# Altium PCB Passenger Side PCB.PcbDoc
Units mm, origin at the board's own origin, x right, y up, seen from the top; angles counter-clockwise.
Board outline 99.7 x 17.4 mm, 4 copper layers (Top Layer, Ground, Power, Bottom Layer), stack 0.757 mm thick; 27 components, 19 nets, 73 pads, 66 vias.
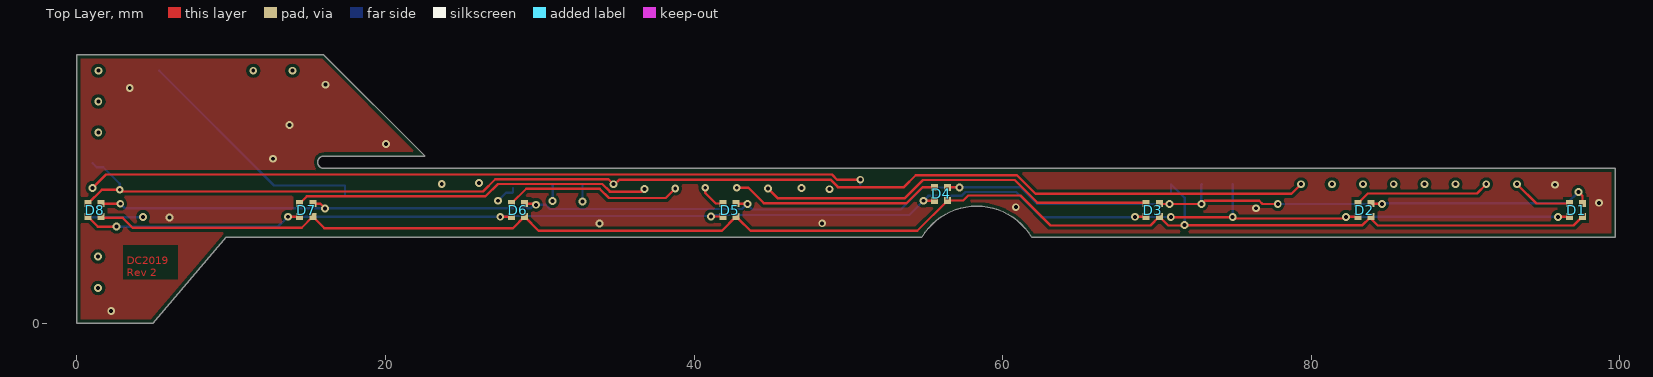
[diagram p0: Top Layer view]
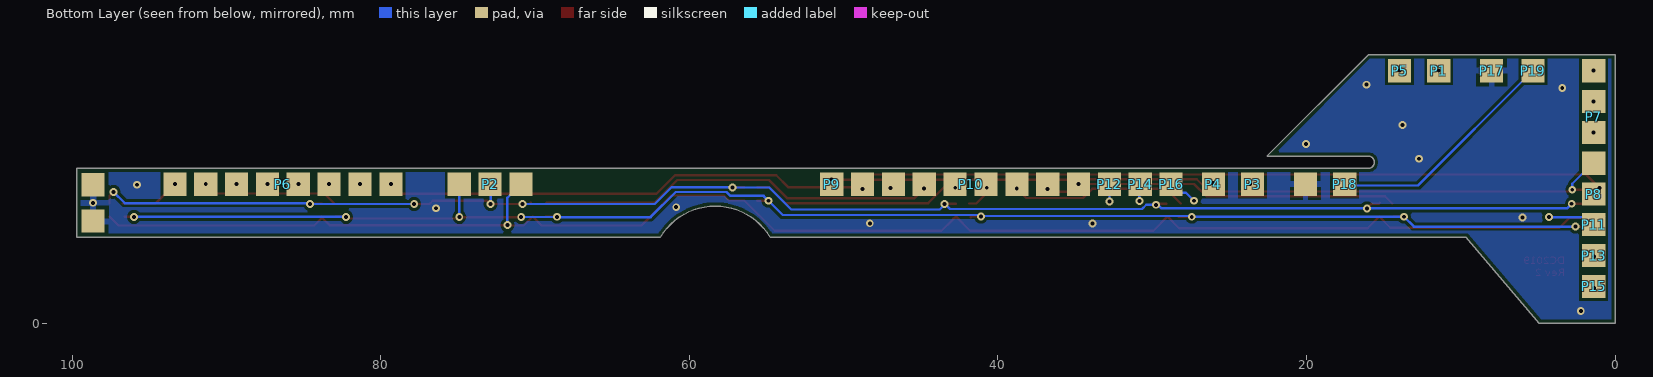
[diagram p1: Bottom Layer view, seen from below]
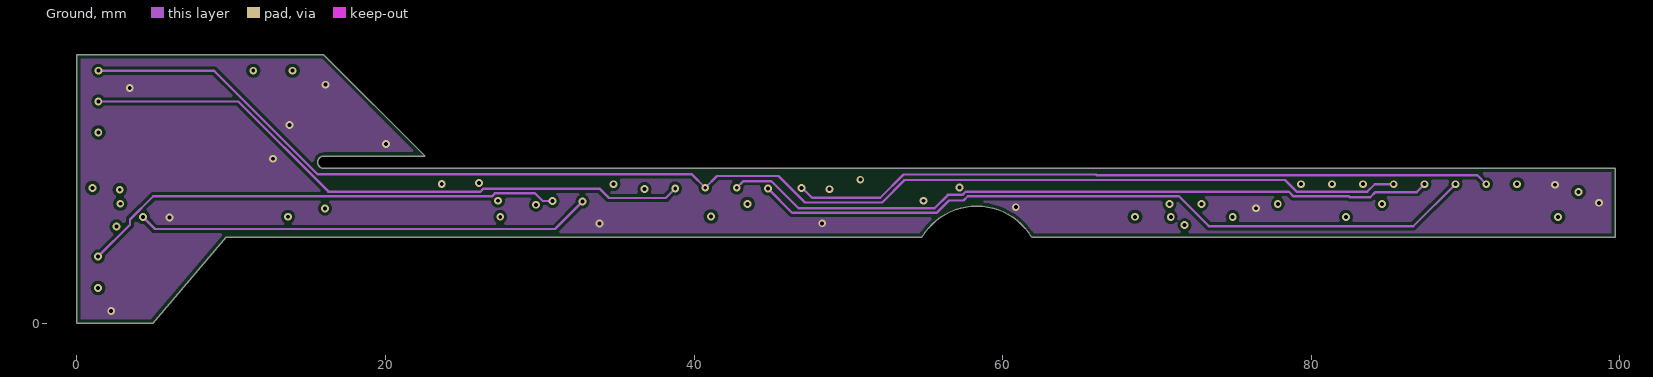
[diagram p2: Ground]
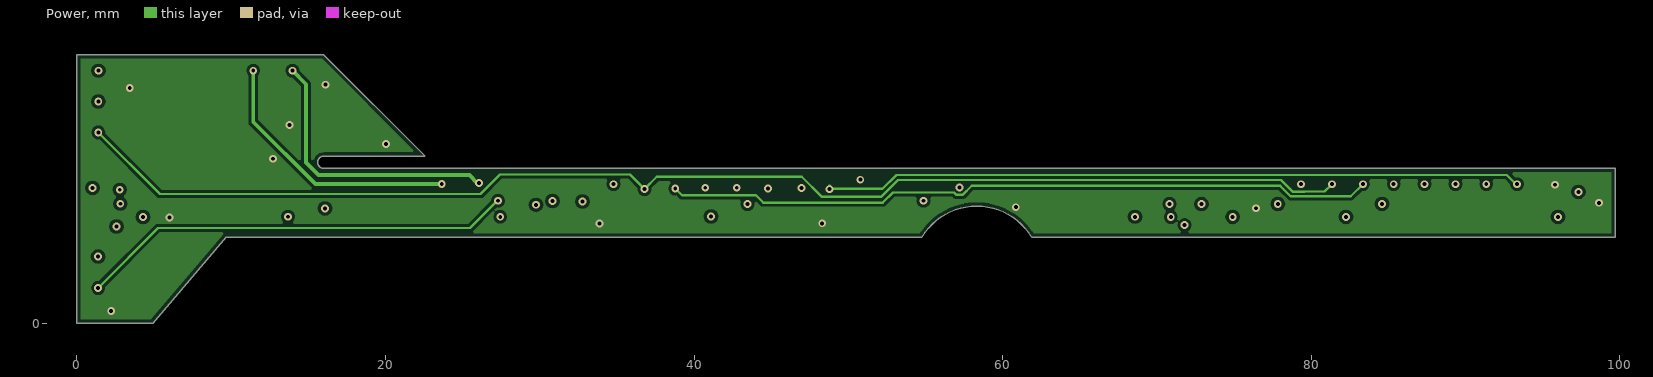
[diagram p3: Power]
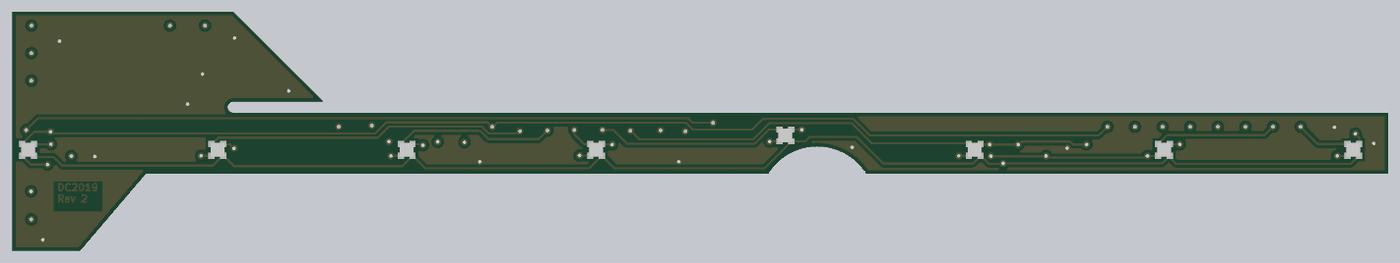
[diagram p4: 3D render of the assembled board from above, using the file's embedded part models]

## Layer stack, top to bottom
Top Solder: solder mask 0.0102, Solder Resist, Dk 3.5
Top Layer: signal copper 0.0356
Dielectric 2: prepreg 0.1422, PP-006, Dk 4.1
Ground: signal copper 0.0356
Dielectric 1: dielectric 0.3302, FR-4, Dk 4.8
Power: signal copper 0.0356
Dielectric 3: prepreg 0.1422, PP-006, Dk 4.1
Bottom Layer: signal copper 0.0356
Bottom Solder: solder mask 0.0102, Solder Resist, Dk 3.5

## Board outline
0,0 0,17.403 16.001,17.403 22.552,10.846 16.001,10.846 ccw(c16.001,10.446) 16.001,10.046 99.695,10.046 99.695,5.601 61.875,5.601 ccw(c58.322,3.433) 54.769,5.601 9.671,5.601 4.907,0

## Design rules (kind name [scope] priority, off if disabled: settings)
BoardOutlineClearance [All] p1: gap=0.254 ignorepadtopadclearanceinfootprint=FALSE
Clearance [All] p1: gap=0.152 ignorepadtopadclearanceinfootprint=FALSE except(0: Arc-Hole Track-Hole SMDPad-Hole THPad-Hole Via-Hole Fill-Hole Poly-Hole Region-Hole Text-Hole; 0.203: Arc-Poly Track-Poly SMDPad-Poly THPad-Poly Via-Poly Fill-Poly Poly-Poly Poly-Text)
DiffPairsRouting [All] p1: maxlimit=0.254 minlimit=0.152 mostfreqgap=0.152 toplayer_minwidth=0.152 toplayer_maxwidth=0.381 toplayer_prefwidth=0.203 midlayer1_minwidth=0.152 midlayer1_maxwidth=0.381 midlayer1_prefwidth=0.203 midlayer2_minwidth=0.152 midlayer2_maxwidth=0.381 midlayer2_prefwidth=0.203 bottomlayer_minwidth=0.152 bottomlayer_maxwidth=0.381 bottomlayer_prefwidth=0.203 maxuncoupledlength=12.7
HoleSize [All] p1: absolutevalues=TRUE maxlimit=3.81 minlimit=0.254 maxpercent=80.000 minpercent=20.000
HoleToHoleClearance [All] p1: gap=0.457 allowstackedmicrovias=TRUE
MinimumAnnularRing [All] p1: minimumring=0.127
MinimumSolderMaskSliver [All] p1: minsoldermaskwidth=0.152
PlaneClearance [All] p1: clearance=0.305
PlaneConnect PlaneConnect_IsVia [IsVia] p1: planeconnectstyle=Direct reliefexpansion=0.508 reliefentries=4 reliefconductorwidth=0.254 reliefairgap=0.254
PlaneConnect [All] p2: planeconnectstyle=Relief reliefexpansion=0.508 reliefentries=4 reliefconductorwidth=0.381 reliefairgap=0.305
PolygonConnect PolygonConnect_IsVia [IsVia] p1: connectstyle=Direct reliefconductorwidth=0.254 reliefentries=4 polygonreliefangle="45 Angle" airgapwidth=0.254
PolygonConnect [All] p2: connectstyle=Relief reliefconductorwidth=0.381 reliefentries=4 polygonreliefangle="90 Angle" airgapwidth=0.254
RoutingVias [All] p1: holewidth=0.254 width=0.508 viastyle="Through Hole" minholewidth=0.254 minwidth=0.508 maxholewidth=0.508 maxwidth=1.016
SilkToSilkClearance [All] p1: silktosilkclearance=0.152
SilkToSolderMaskClearance [IsPad] p1: minsilkscreentomaskgap=0.152 clearancetoexposedcopper=TRUE
SolderMaskExpansion [Not IsVia] p1: expansion=0.102
Width [All] p1: maxlimit=1.27 minlimit=0.152 preferedwidth=0.152
22 further rules are at their usual default settings.

## Components (designator, comment, footprint, x,y, rotation, side; value= is the part's Value field where it differs from the comment)
D1 "0402 RGB LED" "0404 RGB LED" 97.162,7.348 r0 top
D2 "0402 RGB LED" "0404 RGB LED" 83.446,7.348 r0 top
D3 "0402 RGB LED" "0404 RGB LED" 69.73,7.348 r0 top
D4 "0402 RGB LED" "0404 RGB LED" 56.014,8.395 r0 top
D5 "0402 RGB LED" "0404 RGB LED" 42.298,7.348 r0 top
D6 "0402 RGB LED" "0404 RGB LED" 28.582,7.348 r0 top
D7 "0402 RGB LED" "0404 RGB LED" 14.866,7.348 r0 top
D8 "0402 RGB LED" "0404 RGB LED" 1.15,7.348 r0 top
P1 "1p SMD Pads" "1p SMD pad"#1 12.327,16.302 r270 bottom
P2 "3p SMD Pads" "3p SMD pad" 74.912,9.024 r270 bottom
P3 "1p SMD Pads" "1p SMD pad"#2 23.272,9.201 r270 bottom
P4 "1p SMD Pads" "1p SMD pad"#3 26.881,9.197 r0 top
P5 "1p SMD Pads" "1p SMD pad"#4 8.053,16.316 r0 top
P6 "8p SMD Pads" "8p SMD pad" 93.346,9.024 r270 bottom
P7 "4p SMD Pads" "4p SMD pad" 1.023,16.38 r0 bottom
P8 "1p SMD Pads" "1p SMD pad"#5 1.023,8.38 r0 top
P9 "1p SMD Pads" "1p SMD pad"#6 33.586,13.587 r0 top
P10 "8p SMD Pads" "8p SMD pad" 48.775,9.024 r270 bottom
P11 "1p SMD Pads" "1p SMD pad"#7 0.928,18.689 r180 bottom
P12 "1p SMD Pads" "1p SMD pad"#8 32.502,8.996 r90 bottom
P13 "1p SMD Pads" "1p SMD pad"#9 12.301,23.394 r90 bottom
P14 "1p SMD Pads" "1p SMD pad"#10 30.738,9.026 r90 bottom
P15 "1p SMD Pads" "1p SMD pad"#11 12.656,20.086 r90 top
P16 "1p SMD Pads" "1p SMD pad"#12 28.469,9.055 r90 top
P17 "1p SMD Pads" "1p SMD pad"#13 5.53,22.059 r90 bottom
P18 "1p SMD Pads" "1p SMD pad"#14 16.705,22.059 r90 bottom
P19 "1p SMD Pads" "1p SMD pad"#15 11.118,22.059 r90 bottom

## Footprints (in the part's own frame and the unit in brackets; to place one, negate y for a bottom-side part, rotate by r counter-clockwise, add the part's x,y. Pads: shape width x height; smd on the part's side, far side on the other; paste and mask are expansions set on the pad)
"1p SMD pad"#1 [mm]
  rect 1.5x1.5 smd: 1(-0.078,0.896)
"1p SMD pad"#2 [mm]
  rect 1.5x1.5 smd: 1(0.177,-0.223)
"1p SMD pad"#3 [mm]
  rect 1.5x1.5 smd far side: 1(-0.845,-0.174)
"1p SMD pad"#4 [mm]
  rect 1.5x1.5 smd far side: 1(5.917,0.064)
"1p SMD pad"#5 [mm]
  rect 1.5x1.5 smd far side: 1(0.364,0)
"1p SMD pad"#6 [mm]
  rect 1.5x1.5 smd far side: 1(17.188,-4.563)
"1p SMD pad"#7 [mm]
  rect 1.5x1.5 smd: 1(-0.46,-12.289)
"1p SMD pad"#8 [mm]
  rect 1.5x1.5 smd: 1(0.029,0.272)
"1p SMD pad"#9 [mm]
  rect 1.5x1.5 smd: 1(-18.993,-10.914)
"1p SMD pad"#10 [mm]
  rect 1.5x1.5 smd: 1(-0.001,0.037)
"1p SMD pad"#11 [mm]
  rect 1.5x1.5 smd far side: 1(-17.685,11.269)
"1p SMD pad"#12 [mm]
  rect 1.5x1.5 smd far side: 1(-0.03,-0.305)
"1p SMD pad"#13 [mm]
  rect 1.5x1.5 smd: 1(-5.679,2.47)
"1p SMD pad"#14 [mm]
  rect 1.5x1.5 smd: 1(-13.035,0.821)
"1p SMD pad"#15 [mm]
  rect 1.5x1.5 smd: 1(-5.679,-5.786)
"3p SMD pad" [mm]
  rect 1.5x1.5 smd: 1(0,0) 2(0,4) 3(0,2)
"4p SMD pad" [mm]
  rect 1.5x1.5 smd: 1(0.364,0) 2(0.364,2) 3(0.364,4) 4(0.364,6)
"8p SMD pad" [mm]
  rect 1.5x1.5 smd: 1(0,0) 2(0,2) 3(0,4) 4(0,6) 5(0,8) 6(0,10) 7(0,12) 8(0,14)
"0404 RGB LED" [mm] "0404 RGB LED"
  rect 0.45x0.45 smd: 1(-0.425,0.425) 2(0.425,0.425) 3(0.425,-0.425) 4(-0.425,-0.425)
  body extent -0.5,-0.5 0.5,0.5, height 0.52

## Part data
P1 P3 P4 P5 P8 P9 P11 P12 P13 P14 P15 P16 P17 P18 P19: library part "1p SMD"
P2: library part "3p SMD"
P7: library part "4p SMD"

## Free pads (board coordinates)
  rect 1.5x1.5 smd far side: 1(98.643,6.628) 1(98.643,8.99) 2(20.066,9.024)

## Via types
v1: diameter 0.508, hole 0.254, Top Layer to Bottom Layer, tented both sides, 39 vias
v2: diameter 0.508, hole 0.254, Top Layer to Bottom Layer, tented top, 27 vias

## Nets (pads, with @x,y where several pads share a name; then routed paths per layer and width w, separated by ;. In a path a pad name is that pad's centre, name@x,y a point inside that pad or via, vN(x,y) a via of type N, cw(c..) or ccw(c..) an arc to the next point about the centre after c; other vN are vias at no path point)
3v3: P15.1 P16.1 | length 29.7
  Power w0.152: v2(1.377,2.297) 5.264,6.184 25.48,6.184 v1@27.107,7.811 ; v1@27.285,7.843 27.285,7.943 v1(27.293,7.951)
  Bottom Layer w0.152: v2(1.377,2.297) 1.387,2.307 P15.1 ; v1(27.293,7.951) 27.811,8.469 28.219,8.469 28.262,8.512 P16.1@28.262,8.762
BAT_MON: P18.1 P19.1 | length 15.7
  Bottom Layer w0.152: P19.1 12.776,8.936 17.373,8.936 P18.1@17.373,8.362
BLUE2: D1.4 D2.4 D3.4 D4.4 D5.4 D6.4 D7.4 D8.4 P2.1 | length 104.5
  Top Layer w0.152: D8.4 0.714,6.911 1.348,6.277 v1(2.561,6.277) ; v1(13.681,6.916) 13.684,6.919 14.382,6.919 D7.4@14.384,6.921 ; v1(27.438,6.91) 27.444,6.916 28.276,6.916 D6.4@28.282,6.91 ; v1(41.102,6.934) 41.107,6.928 41.724,6.928 41.763,6.89 D5.4@41.763,6.882 ; v1(54.873,7.951) 54.883,7.96 55.583,7.96 D4.4@55.599,7.945 ; v1(68.579,6.91) 68.585,6.916 D3.4@69.299,6.916 ; v1(70.9,6.895) 70.98,6.895 70.994,6.88 74.823,6.88 74.83,6.887 v1@74.926,6.887 ; v1(74.909,6.904) v1@74.926,6.887 ; v1@74.931,6.887 v1@74.926,6.887 ; v1@82.223,6.928 v1(82.246,6.905) 82.255,6.914 82.952,6.914 D2.4@82.955,6.911 ; v1@82.278,6.876 82.206,6.804 75.01,6.804 v1@74.926,6.887 ; v1(95.997,6.905) 96.006,6.914 96.597,6.914 D1.4@96.605,6.921
  Bottom Layer w0.152: v1(2.561,6.277) 13.042,6.277 v1(13.681,6.916) 27.432,6.916 v1(27.438,6.91) 27.493,6.965 41.071,6.965 v1(41.102,6.934) 41.197,7.03 53.952,7.03 v1(54.873,7.951) 55.186,8.264 56.673,8.264 ; 56.674,8.265 57.337,8.265 57.595,8.522 60.876,8.522 62.511,6.888 68.557,6.888 v1(68.579,6.91) 68.587,6.902 70.892,6.902 v1(70.9,6.895) ; v1(74.909,6.904) 74.912,6.907 P2.1 ; v1(82.246,6.905) v1(95.997,6.905)
Col1: D1.1 P6.1 P10.1 | length 49.4
  Top Layer w0.152: v2(93.346,9.024) 94.598,7.773 D1.1
  Power w0.152: v2(48.773,8.7) 48.773,8.931 48.977,8.727 52.217,8.727 53.111,9.62 92.678,9.62 93.275,9.024 v2(93.346,9.024)
Col2: D2.1 P6.2 P10.2 | length 54.4
  Top Layer w0.152: D2.1 83.665,8.417 90.74,8.417 v2(91.346,9.024)
  Ground w0.152: v2(46.972,8.767) 47.032,8.767 47.652,8.147 52.066,8.147 53.573,9.653 66.047,9.653 66.101,9.599 90.771,9.599 v2(91.346,9.024)
Col3: D3.1 P6.3 P10.3 | length 73.5
  Top Layer w0.152: v2(44.79,8.741) 45.412,8.12 53.671,8.12 54.845,9.294 60.783,9.294 62.252,7.824 69.253,7.824 D3.1
  Ground w0.152: v2(44.79,8.741) 46.368,7.163 55.714,7.163 56.52,7.968 57.472,7.968 57.74,8.237 71.427,8.237 73.369,6.294 86.617,6.294 v2(89.346,9.024)
Col4: D4.1 P6.4 P10.4 | length 60.1
  Top Layer w0.152: v2(42.768,8.793) 43.519,8.793 44.523,7.789 53.771,7.789 54.816,8.834 55.575,8.834 D4.1
  Ground w0.152: v2(42.768,8.793) 43.2,9.225 45.008,9.225 46.765,7.468 55.588,7.468 56.449,8.329 57.401,8.329 57.614,8.541 78.547,8.541 78.856,8.232 82.446,8.232 82.495,8.183 83.828,8.183 84.157,8.512 86.835,8.512 v2(87.346,9.024)
Col5: D5.1 P6.5 P7.1 P10.5 | length 91
  Top Layer w0.152: v2(40.725,8.793) 40.725,8.451 41.403,7.773 D5.1
  Ground w0.152: v2(1.393,16.38) 8.892,16.38 15.613,9.659 39.858,9.659 v2(40.725,8.793) 41.487,9.555 45.476,9.555 47.19,7.842 52.192,7.842 53.644,9.294 78.299,9.294 79.052,8.541 83.631,8.541 84.113,9.024 v2(85.346,9.024)
Col6: D6.1 P6.6 P7.2 P10.6 | length 98.1
  Top Layer w0.152: D6.1 29.118,8.734 33.88,8.734 34.484,8.13 38.163,8.13 v2(38.78,8.747)
  Ground w0.152: v2(1.387,14.38) 10.461,14.38 16.3,8.541 16.358,8.541 16.36,8.54 26.161,8.54 26.36,8.738 33.87,8.738 34.482,8.126 38.159,8.126 v2(38.78,8.747)
  Power w0.152: v2(38.78,8.747) 39.217,8.31 44.01,8.31 44.487,7.833 52.233,7.833 52.889,8.489 56.842,8.489 57.002,8.329 57.401,8.329 57.993,8.92 77.983,8.92 78.666,8.237 82.559,8.237 v2(83.346,9.024)
Col7: D7.1 P6.7 P7.3 P10.7 | length 107.5
  Top Layer w0.152: D7.1 14.905,8.237 26.479,8.237 27.283,9.04 34.044,9.04 34.543,8.541 36.619,8.541 v2(36.783,8.706)
  Power w0.152: v2(1.387,12.38) 5.378,8.389 26.155,8.389 27.417,9.651 35.839,9.651 v2(36.783,8.706) 37.582,9.504 42.251,9.504 42.254,9.507 46.975,9.507 48.263,8.218 52.14,8.218 53.216,9.294 78.04,9.294 78.793,8.541 79.546,8.541 79.552,8.547 80.87,8.547 v2(81.346,9.024)
Col8: D8.1 P6.8 P7.4 P10.8 | length 83.6
  Top Layer w0.152: D8.1 1.618,8.666 v1(2.778,8.666) 2.893,8.551 26.326,8.551 27.12,9.345 34.454,9.345 v2(34.775,9.024) 34.865,9.024 35.162,9.32 48.835,9.32 49.322,8.833 53.456,8.833 53.457,8.835 53.608,8.835 54.371,9.598 54.718,9.598 54.719,9.599 60.934,9.599 62.132,8.4 78.723,8.4 79.324,9.002 v2@79.324,9.014
  Bottom Layer w0.152: P7.4@1.023,10.38 1.278,10.126 1.701,10.126 2.778,9.05 v1(2.778,8.666)
  other v2: 79.346,9.024
GND: P17.1 pad.1 pad.2
  other v1: 2.221,0.809 33.879,6.482 48.303,6.488 5.992,6.862 76.431,7.467 60.854,7.534 98.643,7.818 95.806,8.989 12.702,10.675 20.03,11.636 13.785,12.85 3.425,15.249 16.11,15.473
GREEN2: D1.3 D2.3 D3.3 D4.3 D5.3 D6.3 D7.3 D8.3 P2.2 | length 104.9
  Top Layer w0.152: D8.3@1.586,6.981 1.586,6.98 1.724,6.842 2.968,6.842 3.609,6.202 14.57,6.202 D7.3 16.041,6.173 28.257,6.173 D6.3 29.93,6 41.8,6 D5.3 ; D5.3@42.788,6.857 42.872,6.774 42.89,6.774 43.662,6.002 54.47,6.002 D4.3 57.453,7.97 57.772,8.29 61.152,8.29 63.095,6.347 69.579,6.347 D3.3 70.735,6.342 71.766,6.342 v1(71.793,6.369) 71.809,6.353 83.301,6.353 D2.3@83.802,6.854 ; D2.3 D2.3@83.802,6.854 ; D1.3 97.006,6.342 84.313,6.342 D2.3@83.802,6.854
  Bottom Layer w0.152: P2.2@70.912,8.482 P2.2 71.793,8.143 v1(71.793,6.369)
GREEN5: P11.1 P12.1 | length 34
  Top Layer w0.152: v1@32.758,7.801 32.765,7.809 v1(32.765,7.902)
  Ground w0.152: v1(4.284,6.893) 5.055,6.121 30.985,6.121 v1(32.765,7.902)
  Bottom Layer w0.152: P11.1@1.037,6.876 4.266,6.876 v1(4.284,6.893) ; v1(32.765,7.902) 32.765,9.015 P12.1
MOTOR_OUT_A: P1.1 P3.1 | length 17.2
  Power w0.254: v2(11.43,16.38) 11.43,13.054 15.451,9.033 v2(23.645,9.033)
MOTOR_OUT_B: P4.1 P5.1 | length 18.1
  Power w0.254: v2(13.97,16.38) 14.848,15.503 14.848,10.434 15.667,9.615 25.437,9.615 25.94,9.111 v2(26.05,9.111)
RED2: D1.2 D2.2 D3.2 D4.2 D5.2 D6.2 D7.2 D8.2 P2.3 | length 104.6
  Top Layer w0.152: D8.2@1.543,7.755 1.552,7.764 2.803,7.764 v1(2.812,7.755) ; D7.2@15.25,7.827 15.314,7.763 15.771,7.763 v1(16.077,7.457) ; D6.2@29.08,7.771 29.091,7.76 29.754,7.76 29.758,7.757 v1(29.758,7.687) ; D5.2@42.713,7.771 42.727,7.758 43.452,7.758 v1(43.467,7.743) ; D4.2@56.442,8.823 56.449,8.816 57.197,8.816 v1(57.202,8.812) ; D3.2@70.28,7.829 70.371,7.739 v1(70.812,7.739) v1@72.772,7.739 ; v1(72.883,7.732) 73.101,7.95 76.631,7.95 76.842,7.739 v1(77.836,7.739) ; D2.2@83.832,7.771 83.843,7.76 84.579,7.76 v1(84.591,7.748) ; v1(97.318,8.525) 97.587,8.256 D1.2
  Bottom Layer w0.152: v1(2.812,7.755) 3.11,7.457 v1(16.077,7.457) 29.391,7.457 29.621,7.687 v1(29.758,7.687) 30.392,7.687 30.66,7.419 43.108,7.419 43.432,7.743 v1(43.467,7.743) 43.467,7.687 43.768,7.385 53.402,7.385 54.828,8.812 v1(57.202,8.812) 57.217,8.827 61.157,8.827 62.245,7.739 v1(70.812,7.739) ; v1(72.883,7.732) 72.869,7.746 72.883,7.759 72.883,8.995 P2.3 ; v1(77.836,7.739) 77.84,7.744 84.587,7.744 v1(84.591,7.748) 84.642,7.799 96.592,7.799 v1(97.318,8.525)
RED5: P8.1 P9.1 | length 50.6
  Top Layer w0.152: v2(1.01,8.784) 1.876,9.65 48.937,9.65 49.271,9.316 v2(50.774,9.316)
  Bottom Layer w0.152: P9.1 v2(50.774,9.316)
REV_LIGHT: P13.1 P14.1 | length 32.7
  Ground w0.152: v2(1.373,4.331) 3.443,6.401 3.443,6.735 4.944,8.237 16.232,8.237 16.234,8.235 26.894,8.235 27.093,8.433 29.694,8.433 30.196,7.932 v1(30.83,7.932)
  Bottom Layer w0.152: P14.1 30.83,8.969 30.83,7.976 30.852,7.954 v1(30.83,7.932)

## Polygon pours and split planes (outlines as drawn)
GND on Bottom Layer "Bottom Layer-GND" (solid, remove dead copper, pour order 0): -0.118,-0.13 -0.118,18.093 100.313,18.093 100.313,-0.003
GND on Ground "GND_L02_P004" (solid, remove dead copper, pour order 4): -0.04,-0.026 -0.04,18.198 100.391,18.198 100.391,0.102
GND on Top Layer "Top Layer-GND" (solid, remove dead copper, pour order 2): -0.074,-0.025 -0.074,18.199 100.357,18.199 100.357,0.102
GND on Power "Power-GND" (solid, remove dead copper, pour order 6): -0.014,-0.007 -0.015,18.217 100.416,18.217 100.416,0.121

## Other copper
Top Layer:
  text "DC2019 / Rev 2" at 3.222,3.067 h0.51

## Silkscreen, mask and mechanical layers (free items; w line width, h text height)
Mechanical 2:
  the board outline again, w0.013